# EAGLE board h_bridge3 (EAGLE 4.16)
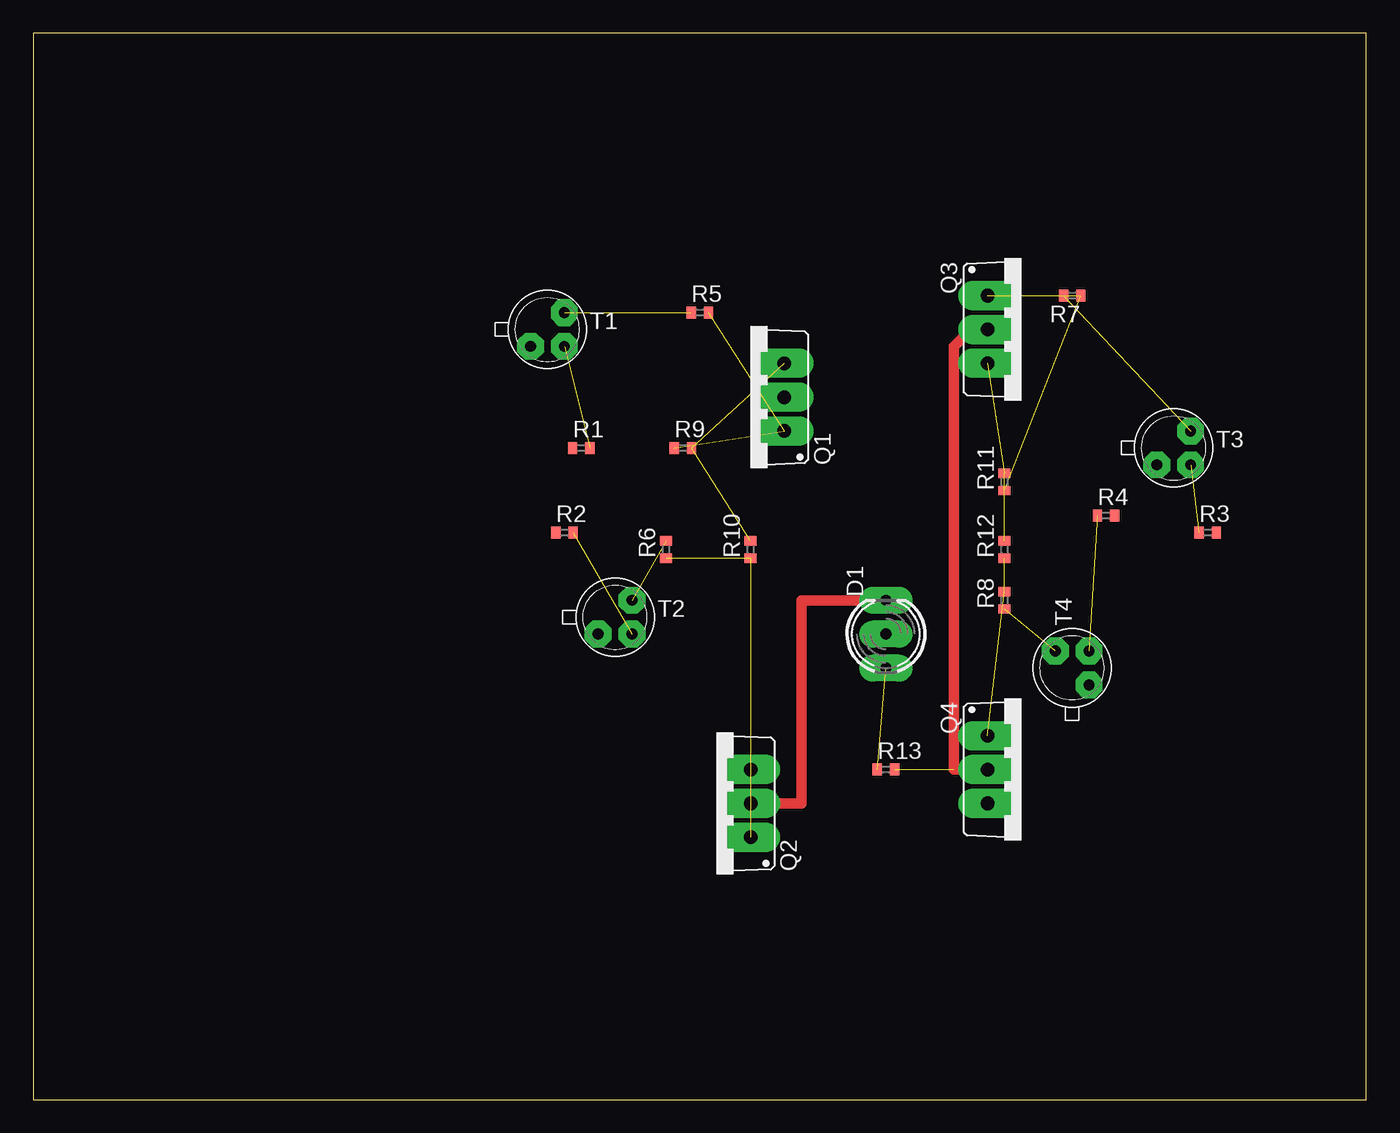
[diagram p0: board, top side]
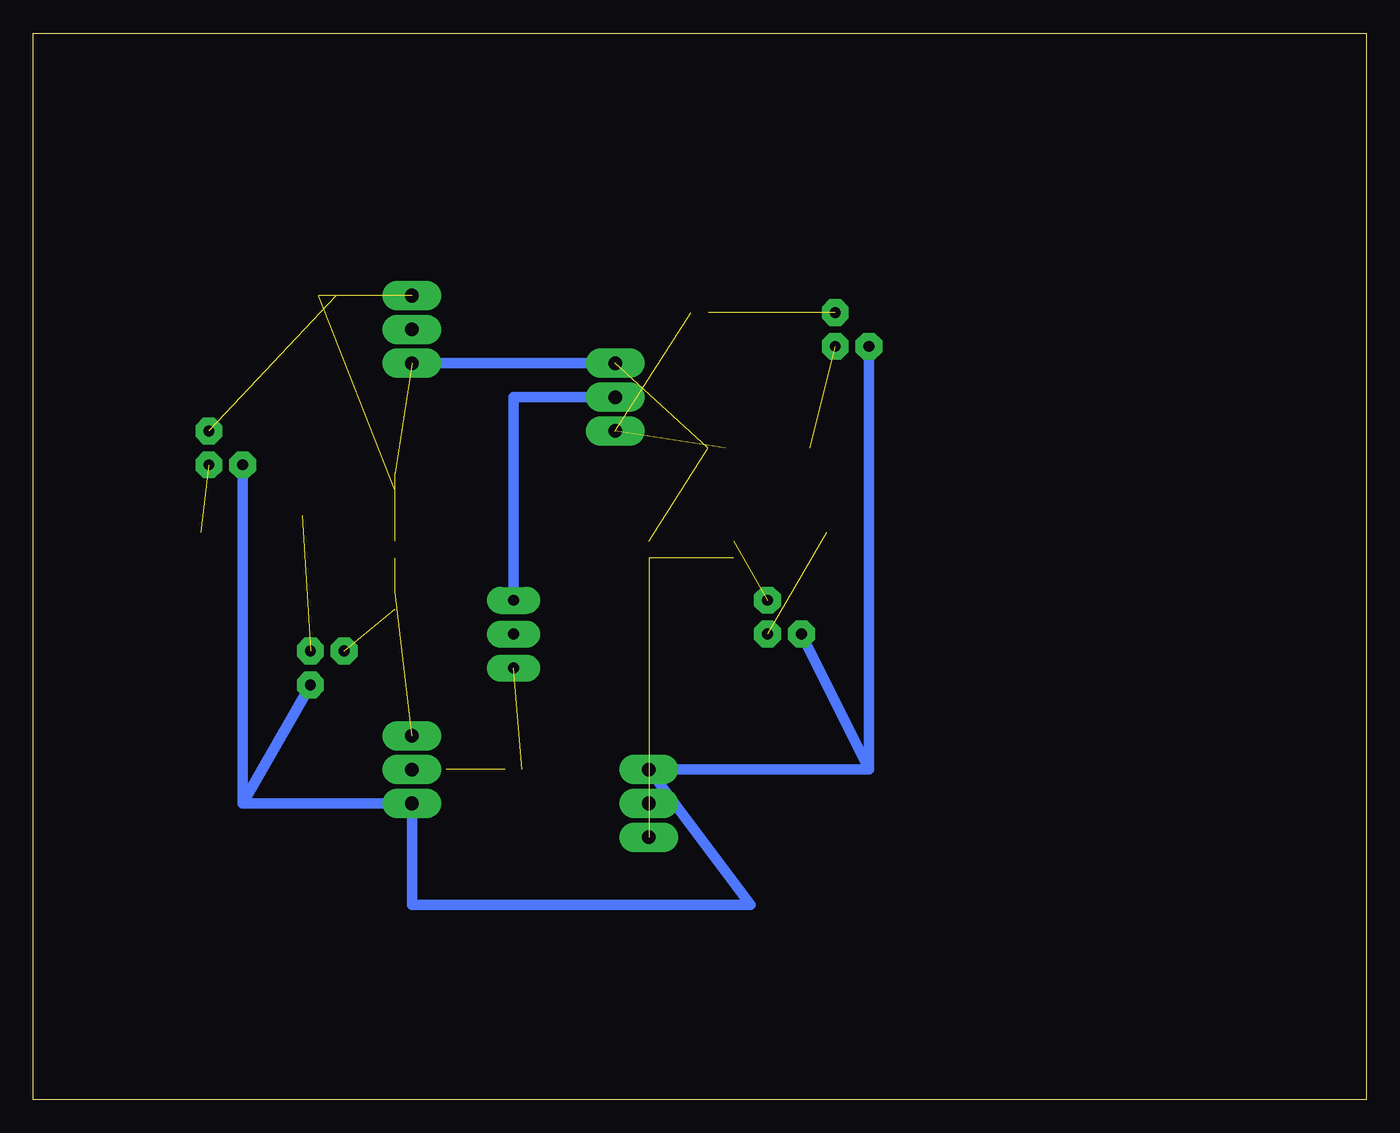
[diagram p1: board, bottom side, seen from below]

Size 100 x 80 mm. Coordinates in mm from the lower left corner, seen from the top.
Outline: 0,0 100,0 100,80 0,80 0,0
Copper layers (1*16): Top 0.035mm / dielectric 1.5mm / Bottom 0.035mm
Design rules "FJ043CWRTMEP27Y3QS": minimum track width 0.8mm, minimum drill 0.8mm, track to track 0.8mm, track to pad 0.8mm, pad to pad 0.45mm, via to via 0.8mm, smd to smd 8mil, copper to edge 10mil, drill to drill 8mil, minimum pad ring 0.6mm, minimum via ring 0.6mm, stop-mask expansion 0mil, vias tented up to drill 0mil, thermal gap 10mil

## Footprints (pad centres in the part's own frame; a part is rotated, then mirrored left to right if it is on the bottom)
DUOLED5MM = drill 0.813 long: AG -2.54,0; AR 2.54,0; K 0,0
TO220BV = drill 1.016 long: D 0,-2.54; G -2.54,-2.54; S 2.54,-2.54
R0402 = smd 0.7 x 0.9: 1 -0.65,0; 2 0.65,0
TO18 = drill 0.813 octagon: 1 -1.27,-1.27; 2 1.27,-1.27; 3 1.27,1.27

## Placement (x,y rotation side)
D1  [DUOLED5MM]  63.97,34.92 90 top
Q1  IRF9530  [TO220BV]  53.81,52.7 90 top
Q2  IRF740  [TO220BV]  51.27,22.22 90 top
Q3  IRF9530  [TO220BV]  74.13,57.78 270 top
Q4  IRF740  [TO220BV]  74.13,24.76 270 top
R1  22k  [R0402]  41.11,48.89 0 top
R2  22k  [R0402]  39.84,42.54 0 top
R3  22k  [R0402]  88.1,42.54 0 top
R4  22k  [R0402]  80.48,43.81 0 top
R5  100  [R0402]  50,59.05 0 top
R6  100  [R0402]  47.46,41.27 90 top
R7  100  [R0402]  77.94,60.32 180 top
R8  100  [R0402]  72.86,37.46 90 top
R9  10k  [R0402]  48.73,48.89 0 top
R10  10k  [R0402]  53.81,41.27 90 top
R11  10k  [R0402]  72.86,46.35 90 top
R12  10k  [R0402]  72.86,41.27 90 top
R13  [R0402]  63.97,24.76 0 top
T1  2N2222  [TO18]  38.57,57.78 0 top
T2  2N2222  [TO18]  43.65,36.19 0 top
T3  2N2222  [TO18]  85.56,48.89 0 top
T4  2N2222  [TO18]  77.94,32.38 90 top

## Library data of the parts
D1 = led
Q1-Q4 = transistor-power
R1-R13 = quantum-sensor
T1-T4 = transistor

## Nets
+12V: Q1.S Q3.S R9.2 R10.2 R11.2 R12.2
GND: Q2.S Q4.S T1.1 T2.1 T3.1 T4.1
N$3: Q3.D Q4.D R13.2
N$4: D1.AR Q1.D Q2.D
N$5: D1.AG R13.1
N$6: Q3.G R7.1 R11.1
N$7: R7.2 T3.3
N$8: R3.1 T3.2
N$9: Q1.G R5.2 R9.1
N$10: R5.1 T1.3
N$11: R1.2 T1.2
N$12: Q4.G R8.2 R12.1
N$13: R8.1 T4.3
N$14: R4.1 T4.2
N$15: R2.2 T2.2
N$16: R6.2 T2.3
N$17: Q2.G R6.1 R10.1

## Tracks (layer width: path | path; a pad name or v marks a point on that pad's centre or on a via)
+12V  (4 unrouted)
  Bottom 0.8: Q1.S Q3.S
GND
  Bottom 0.8: 84.29,22.22 T4.1 | 84.29,22.22 Q4.S 71.59,14.6 46.19,14.6 Q2.S 37.3,24.76 | 84.29,22.22 T3.1 | T2.1 37.3,24.76 | 37.3,24.76 T1.1
N$3  (1 unrouted)
  Top 0.8: Q4.D 69.05,24.76 69.05,56.51 70.32,57.78 Q3.D
N$4
  Top 0.8: Q2.D 57.62,22.22 57.62,37.46 D1.AR
  Bottom 0.8: D1.AR 63.97,52.7 Q1.D
N$5  (1 unrouted)
N$6  (2 unrouted)
N$7  (1 unrouted)
N$8  (1 unrouted)
N$9  (2 unrouted)
N$10  (1 unrouted)
N$11  (1 unrouted)
N$12  (2 unrouted)
N$13  (1 unrouted)
N$14  (1 unrouted)
N$15  (1 unrouted)
N$16  (1 unrouted)
N$17  (2 unrouted)